# EAGLE board DuplexOptoIso (EAGLE 6.4)
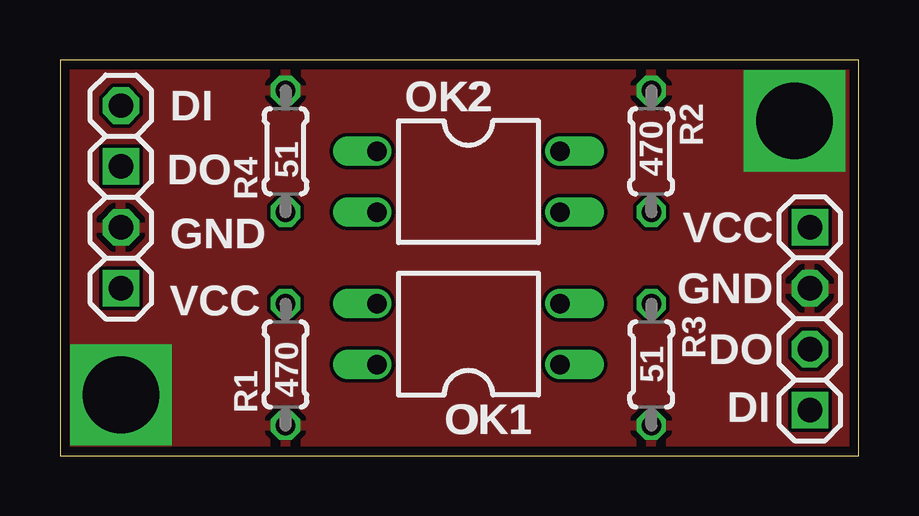
[diagram p0: board, top side]
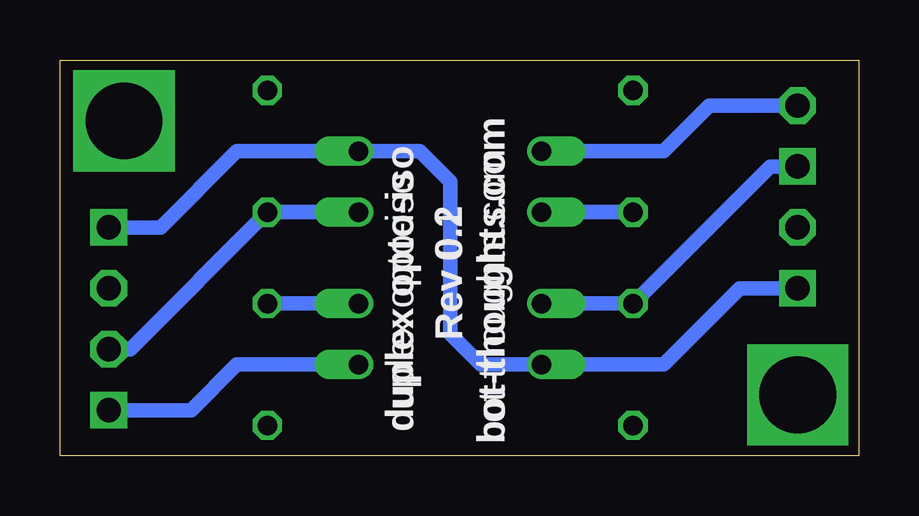
[diagram p1: board, bottom side, seen from below]

Size 33.27 x 16.51 mm. Coordinates in mm from the lower left corner, seen from the top.
Outline: 0,0 33.27,0 33.27,16.51 0,16.5 0,0
Copper layers (1*16): Top 0.0356mm / dielectric 1.5011mm / Bottom 0.0356mm
Design rules "LaenPCBOrder": minimum track width 6mil, minimum drill 13mil, track to track 6mil, track to pad 6mil, pad to pad 6mil, via to via 6mil, smd to smd 6mil, copper to edge 15mil, drill to drill 6mil, minimum pad ring 7mil, minimum via ring 7mil, stop-mask expansion 4mil, vias tented up to drill 20mil, thermal gap 10mil

## Footprints (pad centres in the part's own frame; a part is rotated, then mirrored left to right if it is on the bottom)
1X02-S = drill 1.016 square: 1 -1.27,0 | drill 1.016 octagon: 2 1.27,0
DIL04 = drill 0.813 offset: 1 -1.27,-3.81; 2 1.27,-3.81; 3 1.27,3.81; 4 -1.27,3.81
0204/5 = drill 0.813 octagon: 1 -2.54,0; 2 2.54,0

## Placement (x,y rotation side)
JP1  1IN2OUT  [1X02-S]  31.24,3.17 90 top
JP2  1OUT2IN  [1X02-S]  2.54,13.34 90 top
JP3  POWER  [1X02-S]  2.54,8.26 90 top
JP4  POWER  [1X02-S]  31.24,8.26 270 top
OK1  PC817  [DIL04]  17.02,5.08 90 top
OK2  PC817  [DIL04]  17.02,11.43 270 top
R1  470  [0204/5]  9.4,3.81 90 top
R2  470  [0204/5]  24.64,12.7 270 top
R3  51  [0204/5]  24.64,3.81 90 top
R4  51  [0204/5]  9.4,12.7 270 top

## Library data of the parts
JP1-JP4 = pinhead-2
OK1 OK2 = optocoupler; MPN: PC817X4J000F; OC_FARNELL: 9707727; OC_NEWARK: 97K7059
R1-R4 = rcl

## Nets
5V: JP3.1 JP4.1 OK1.4 OK2.4
GND: JP3.2 JP4.2 R1.1 R2.1 R3.1 R4.1
IN1: JP1.1 OK1.1
IN2: JP2.2 OK2.1
N$5: OK1.2 R3.2
N$6: OK2.2 R4.2
OUT1: JP2.1 OK1.3 R1.2
OUT2: JP1.2 OK2.3 R2.2

## Tracks (layer width: path | path; a pad name or v marks a point on that pad's centre or on a via)
5V
  Bottom 0.61: JP3.1 4.95,6.99 8.13,3.81 OK1.4 15.75,3.81 17.02,5.08 17.02,11.43 18.29,12.7 OK2.4 25.91,12.7 29.08,9.53 JP4.1
GND  (via drill 3.2)
  other vias: 2.54,2.54 30.61,13.97
  pour Top: 0,0 0,16.51 33.27,16.51 33.27,0
IN1
  Bottom 0.61: JP1.1 27.81,1.91 25.91,3.81 OK1.1
IN2
  Bottom 0.61: OK2.1 8.13,12.7 6.22,14.61 JP2.2
N$5
  Bottom 0.61: OK1.2 R3.2
N$6
  Bottom 0.61: OK2.2 R4.2
OUT1
  Bottom 0.61: OK1.3 R1.2 3.68,12.06 JP2.1
OUT2
  Bottom 0.61: OK2.3 R2.2 30.35,4.45 JP1.2

## Text on the board
tPlace: DI | DO | VCC | GND | GND | VCC | DO | DI
bPlace: Rev 0.1 | bot-thoughts.com | duplex opto-iso
tsilk: R2 | DI | OK2 | 470 | 51 | DO | R4 | VCC | GND | GND | VCC | R3 | DO | 51 | DI | R1 | 470 | OK1
bsilk: Rev 0.2 | bot-thoughts.com | duplex opto-iso